# Altium PCB CH32F&V208W-R0-1v4.PcbDoc (part 3 of 3)
Units mm, origin at the board's own origin, x right, y up, seen from the top; angles counter-clockwise.
Board outline 86.5 x 95 mm, 2 copper layers (Top Layer, Bottom Layer); 65 components, 96 nets, 363 pads, 852 vias.
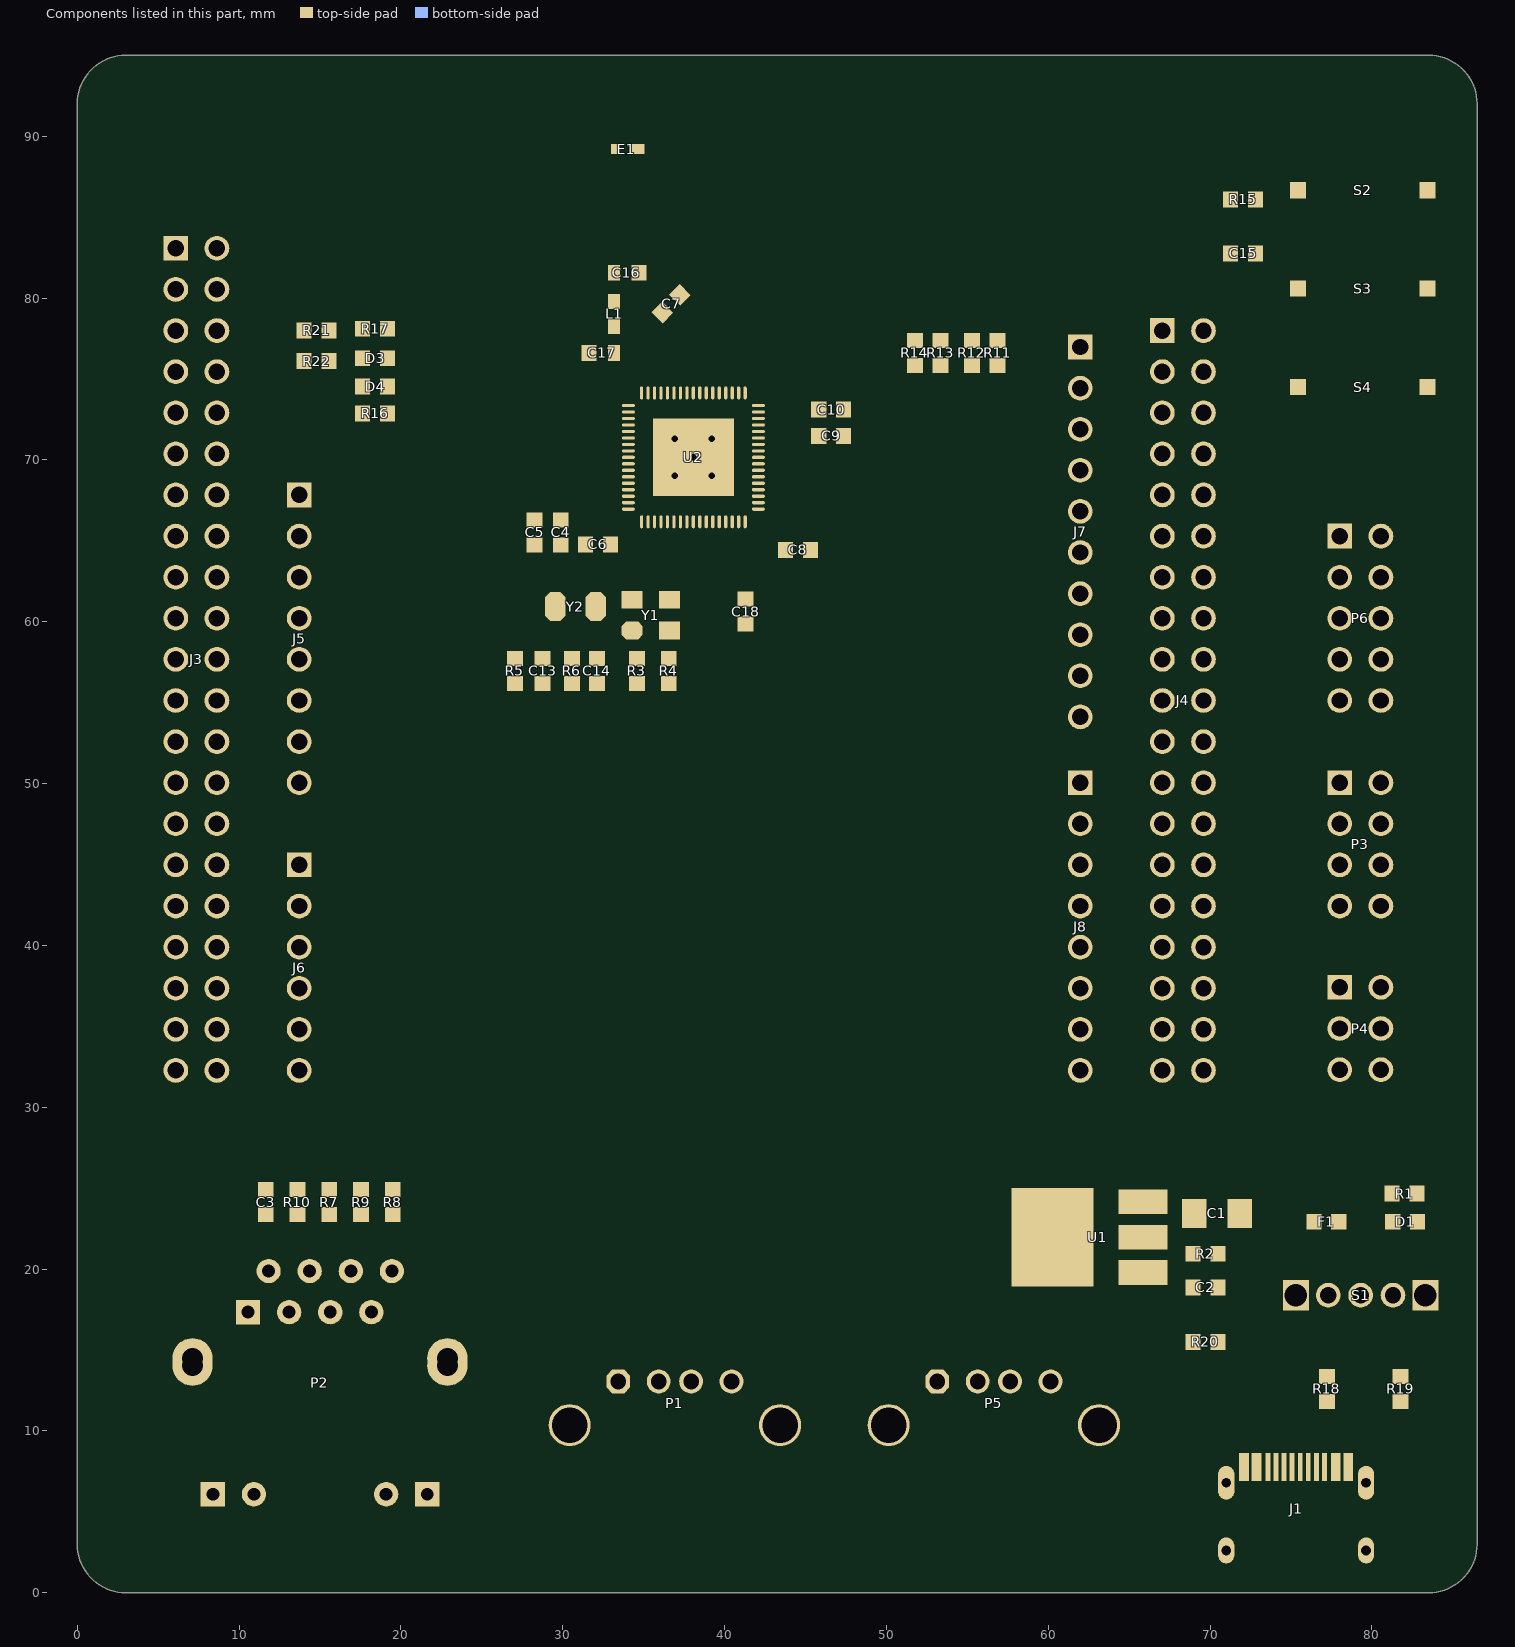
[diagram p3: the components of this part, seen from the top]

## Silkscreen, mask and mechanical layers (free items; w line width, h text height)
Top Overlay:
  lines w0.254: 75.751,31.084 75.751,33.069 ; 75.751,36.656 75.751,38.641 ; 75.837,41.362 75.837,44.642 ; 75.837,47.842 75.837,51.122
  text "VDD" at 10.137,82.536 h0.89
  text "VDD" at 1.644,82.503 h0.89
  text "BOOT0" at 10.137,80.044 h0.89
  text "BOOT1" at 0.4,79.958 h0.89
  text "GND" at 1.602,77.414 h0.89
  text "PC0" at 71.108,77.414 h0.89
  text "GND" at 10.137,77.356 h0.89
  text "PB10" at 57.726,76.392 h0.81
  text "ELED1" at 0.866,74.869 h0.89
  text "PC1" at 71.108,74.869 h0.89
  text "LED1" at 10.137,74.741 h0.89
  text "PB11" at 57.546,73.828 h0.89
  text "ELED2" at 0.485,72.324 h0.89
  text "PC2" at 71.108,72.324 h0.89
  text "LED2" at 10.137,72.287 h0.89
  text "VDDA" at 56.941,71.281 h0.89
  text "KEY" at 10.34,69.825 h0.89
  text "PC14" at 0.908,69.78 h0.89
  text "PC3" at 71.108,69.779 h0.89
  text "GND" at 57.724,68.734 h0.89
  text "PC15" at 0.95,67.235 h0.89
  text "PC4" at 71.108,67.235 h0.89
  text "PB13" at 57.165,66.187 h0.89
  text "3V3" at 15.276,64.725 h0.89
  text "CLK" at 74.28,64.731 h0.81
  text "PD0" at 1.644,64.691 h0.89
  text "PC5" at 71.108,64.69 h0.89
  text "TXD" at 82.031,64.624 h0.89
  text "PB14" at 57.123,63.64 h0.89
  text "NRST" at 15.276,62.168 h0.89
  text "DIO" at 74.671,62.177 h0.81
  text "PD1" at 1.644,62.146 h0.89
  text "PC6" at 71.108,62.145 h0.89
  text "RXD" at 82.031,62.083 h0.89
  text "PB15" at 57.165,61.092 h0.89
  text "3V3" at 15.276,59.612 h0.89
  text "GND" at 74.11,59.622 h0.81
  text "PD2" at 1.644,59.601 h0.89
  text "PC7" at 71.108,59.6 h0.89
  text "GND" at 82.031,59.541 h0.89
  text "PB12" at 57.165,58.545 h0.89
  text "VDD" at 74.195,57.068 h0.81
  text "PD3" at 1.644,57.057 h0.89
  text "+5V" at 15.276,57.055 h0.89
  text "PC8" at 71.108,57.055 h0.89
  text "VDD" at 82.031,57 h0.89
  text "PB0" at 57.817,55.998 h0.89
  text "PD4" at 1.644,54.512 h0.89
  text "GND" at 15.276,54.498 h0.89
  text "PC9" at 71.108,54.51 h0.89
  text "+5V" at 73.905,54.513 h0.81
  text "+5V" at 82.031,54.459 h0.89
  text "PB1" at 58.198,53.451 h0.89
  text "PD5" at 1.644,51.968 h0.89
  text "PC10" at 71.108,51.965 h0.89
  text "GND" at 15.276,51.942 h0.89
  text "+5V" at 82.249,49.469 h0.89
  text "PD6" at 1.644,49.423 h0.89
  text "PC11" at 71.108,49.42 h0.89
  text "PA8" at 57.724,49.394 h0.89
  text "+5V" at 15.276,49.385 h0.89
  text "+5V" at 82.249,46.923 h0.89
  text "PA15" at 0.95,46.879 h0.89
  text "PB9" at 57.859,46.856 h0.89
  text "PC12" at 71.108,46.876 h0.89
  text "GND" at 76.413,44.837 h0.89 r90
  text "PA0" at 15.386,44.415 h0.89
  text "3V3" at 82.249,44.377 h0.89
  text "PA14" at 0.908,44.334 h0.89
  text "PB8" at 57.817,44.319 h0.89
  text "PC13" at 71.108,44.331 h0.89
  text "PA1" at 15.386,41.883 h0.89
  text "VDD" at 82.249,41.832 h0.89
  text "PA13" at 0.95,41.789 h0.89
  text "PB7" at 57.817,41.782 h0.89
  text "PB5" at 71.108,41.786 h0.89
  text "CH32F&V208W-R0-1v4" at 29.304,39.502 h1.02
  text "PA2" at 15.386,39.351 h0.89
  text "PA12" at 0.95,39.245 h0.89
  text "PB6" at 57.859,39.244 h0.89
  text "PB3" at 71.108,39.241 h0.89
  text "PA3" at 15.386,36.818 h0.89
  text "VIO" at 82.059,36.732 h0.89
  text "PA11" at 1.331,36.7 h0.89
  text "PB4" at 57.775,36.707 h0.89
  text "PB2" at 71.108,36.696 h0.89
  text "PA4" at 15.386,34.286 h0.89
  text "VDD" at 82.059,34.259 h0.89
  text "PA7" at 1.602,34.156 h0.89
  text "PA9" at 57.766,34.169 h0.89
  text "VBAT" at 71.108,34.151 h0.89
  text "3V3" at 76.357,33.785 h0.89 r90
  text "VBAT" at 82.059,31.785 h0.89
  text "PA5" at 15.386,31.753 h0.89
  text "PA6" at 1.644,31.611 h0.89
  text "PA10" at 57.072,31.632 h0.89
  text "GND" at 71.108,31.606 h0.89
  text "OFF" at 76.767,14.574 h0.89
  text "ON" at 80.186,14.574 h0.89
Top Solder:
  region: 34.762,73.455 41.367,73.455 41.367,66.857 34.762,66.857
Mechanical 1:
  the board outline again, w0.254

## Text inside footprints (layer, text, board x,y; h text height)
D1: Top Overlay "+" at 80.317,22.643 h1.02 r90
D3: Top Overlay "+" at 20.138,76.556 h1.02 r270
D4: Top Overlay "+" at 20.138,74.803 h1.02 r270
P1: Top Overlay "G" at 40.031,10.006 h1.02; Top Overlay "V" at 32.919,10.006 h1.02; Top Overlay "D+" at 37.237,10.006 h1.02; Top Overlay "D-" at 34.951,10.006 h1.02
P5: Top Overlay "G" at 59.742,10.006 h1.02; Top Overlay "V" at 52.63,10.006 h1.02; Top Overlay "D+" at 56.948,10.006 h1.02; Top Overlay "D-" at 54.662,10.006 h1.02